# EAGLE board comboultra (EAGLE 7.2.0)
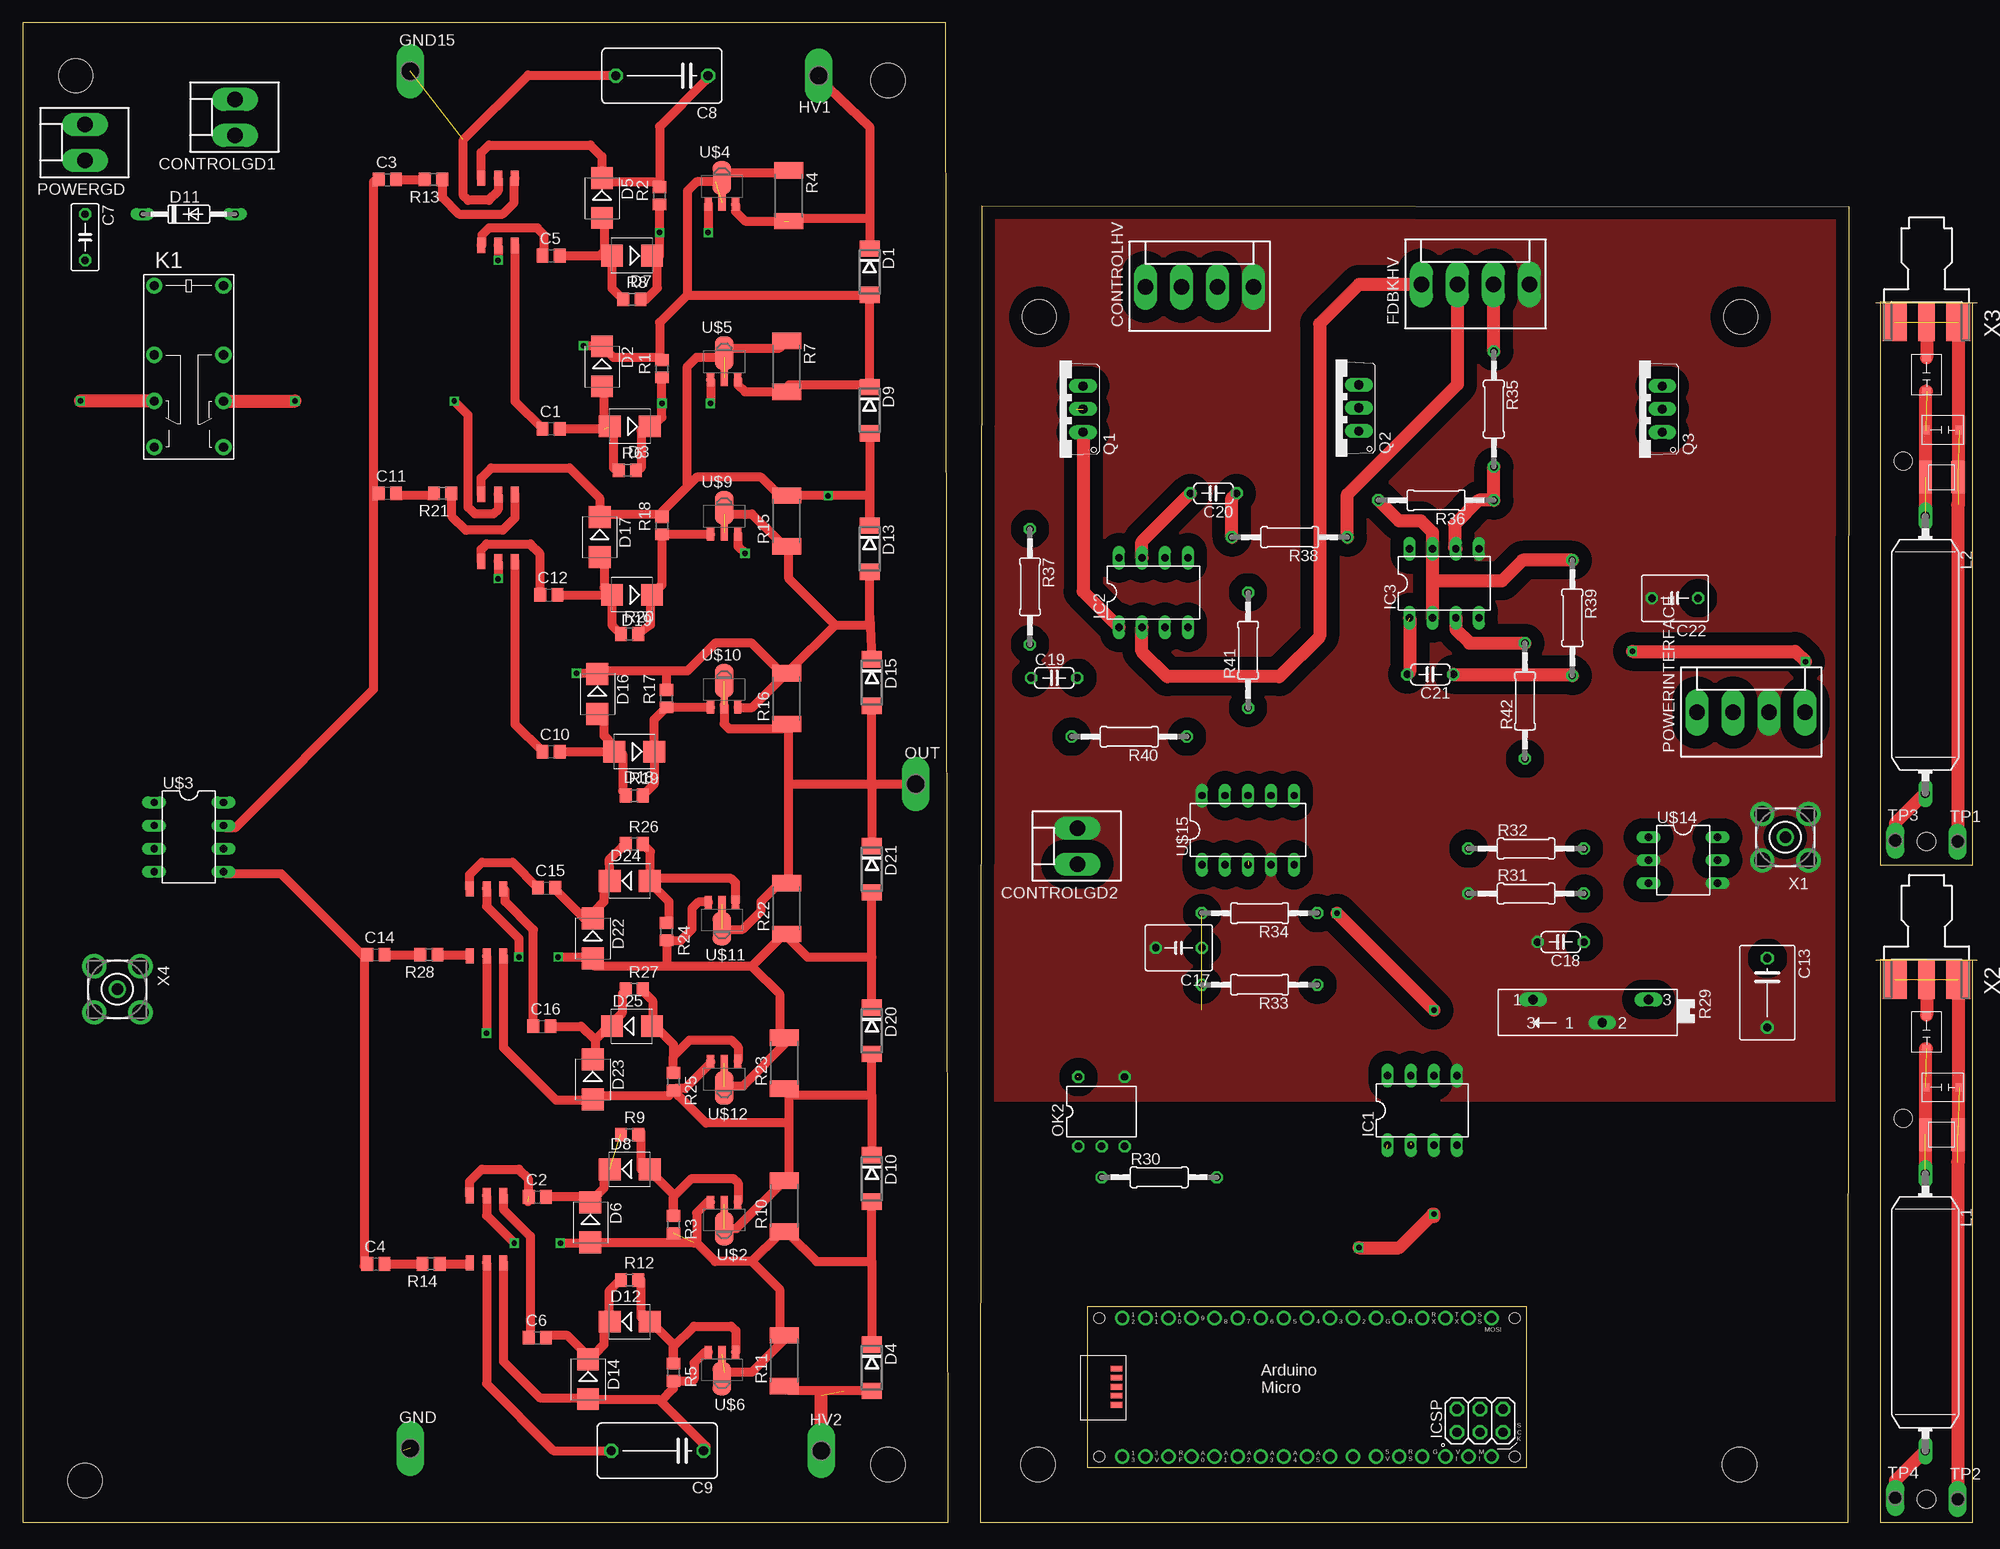
[diagram p0: board, top side]
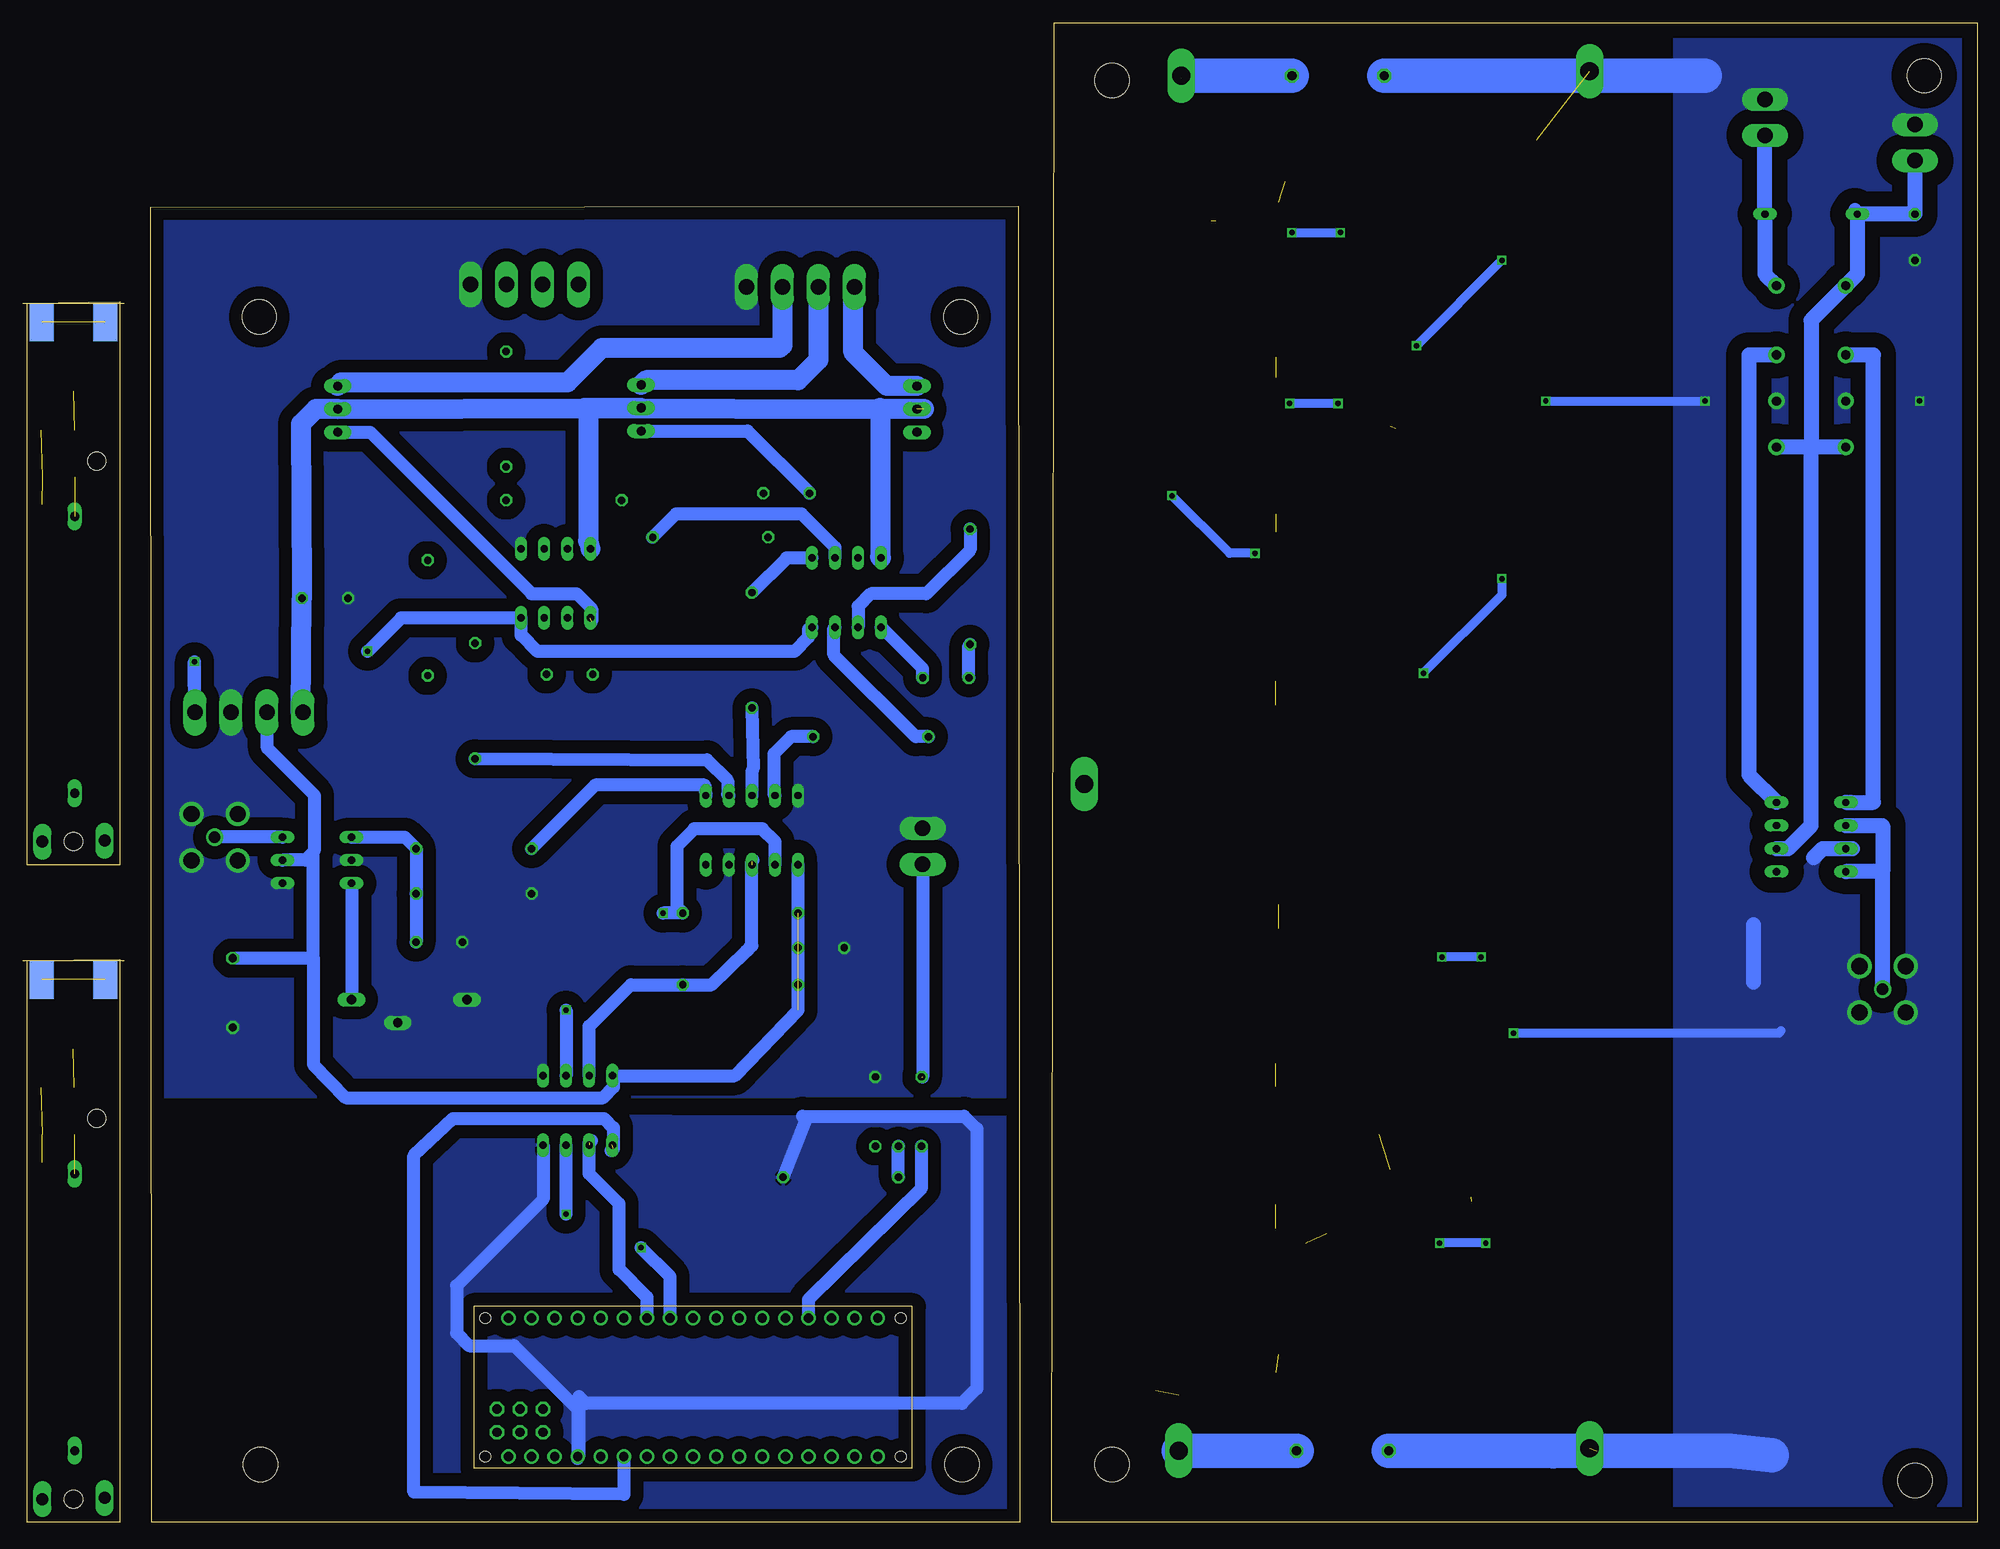
[diagram p1: board, bottom side, seen from below]

Size 214.63 x 165.1 mm. Coordinates in mm from the lower left corner, seen from the top.
Outline: 0,0 101.85,0 101.6,165.1 0,165.1 0,0
Outline: 105.41,0 200.91,0 201.04,144.78 105.54,144.91 105.41,0
Outline: 204.47,0 214.63,0 214.63,61.85 204.47,61.98 204.47,0
Outline: 204.47,72.39 214.63,72.39 214.63,134.24 204.47,134.37 204.47,72.39
Copper layers (1*16): Top 0.035mm / dielectric 1.5mm / Bottom 0.035mm
Design rules "default": minimum track width 10mil, minimum drill 24mil, track to track 8mil, track to pad 8mil, pad to pad 8mil, via to via 8mil, smd to smd 8mil, copper to edge 40mil, drill to drill 8mil, minimum pad ring 10mil, minimum via ring 8mil, stop-mask expansion 4mil, vias tented up to drill 0mil, thermal gap 10mil
Holes 3.8 mm at 95.25,158.75 95.25,6.35 6.86,4.57 5.84,159.26 188.98,6.35 189.1,132.72 111.89,132.72 111.76,6.35
Holes 2 mm at 209.55,2.54 207.01,44.45 209.55,74.93 207.01,116.84

## Footprints (pad centres in the part's own frame; a part is rotated, then mirrored left to right if it is on the bottom)
C0805 = smd 1.3 x 1.5: 1 -0.95,0; 2 0.95,0
C050-030X075 = drill 0.813 octagon: 1 -2.54,0; 2 2.54,0
C102-064X133 = drill 1.016 octagon: 1 -5.08,0; 2 5.08,0
C075-063X106 = drill 0.914 octagon: 1 -3.81,0; 2 3.81,0
C050-050X075 = drill 0.813 octagon: 1 -2.54,0; 2 2.54,0
C050-024X044 = drill 0.813 octagon: 1 -2.54,0; 2 2.54,0
SGC3S = smd 0.9 x 0.8: P$1 0,1.85; P$2 0,-1.85
1111 = smd 1.397 x 3.556: P$1 -1.778,0; P$2 1.778,0
KK-156-2 = drill 1.7 pad 2.184 long: 1 -1.98,0; 2 1.98,0
KK-156-4 = drill 1.7 pad 2.184 long: 1 -5.94,0; 2 -1.98,0; 3 1.98,0; 4 5.94,0
DO214AA = smd 1.8 x 2.2: A 2.55,0; C -2.55,0
SMB = smd 2.4 x 2.4: A 2.2,0; C -2.2,0
DO35-10 = drill 0.813 long: A 5.08,0; C -5.08,0
P1-20Y = drill 2.007 pad 2.54 long: TP 0,0
DIL08 = drill 0.813 long: 1 -3.81,-3.81; 2 -1.27,-3.81; 3 1.27,-3.81; 4 3.81,-3.81; 5 3.81,3.81; 6 1.27,3.81; 7 -1.27,3.81; 8 -3.81,3.81
G5V-2 = drill 1 pad 1.8: 1 -8.89,-3.81; 4 -1.27,-3.81; 6 3.81,-3.81; 8 8.89,-3.81; 9 8.89,3.81; 11 3.81,3.81; 13 -1.27,3.81; 16 -8.89,3.81
SUKW1-30 = drill 1.016 long: 1 -15.24,0; 2 15.24,0
DIL05 = drill 0.813 octagon: 1 -2.54,-3.81; 2 0,-3.81; 3 2.54,-3.81; 4 2.54,3.81; 6 -2.54,3.81
ARDUINO_MICRO = drill 1.016 pad 1.575: 3V3 6.35,1.27; +5V 31.75,1.27; A0 11.43,1.27; A1 13.97,1.27; A2 16.51,1.27; A3 19.05,1.27; A4 21.59,1.27; A5 24.13,1.27; D2 29.21,16.51; D3 26.67,16.51; D4 24.13,16.51; D5 21.59,16.51; D6 19.05,16.51; D7 16.51,16.51; D8 13.97,16.51; D9 11.43,16.51; D10 8.89,16.51; D11 6.35,16.51; D12 3.81,16.51; D13 3.81,1.27; GND 31.75,16.51; GND. 36.83,1.27; MISO] 41.91,1.27; MOSI 44.45,16.51; NC 26.67,1.27; NC. 29.21,1.27; REF 8.89,1.27; RST 34.29,16.51; RST. 34.29,1.27; RX1 36.83,16.51; SCK 44.45,1.27; SS 41.91,16.51; TX1 39.37,16.51; VIN 39.37,1.27 | drill 1.016 pad 1.575 octagon: 5V 40.64,6.477; GND_ 45.72,6.477; MISO. 40.64,3.937; MOSI. 43.18,6.477; RESET.. 45.72,3.937; SCK. 43.18,3.937 | smd 1.27 x 0.635: <USB>+V 3.15,10.947; <USB>D+ 3.15,9.957; <USB>D- 3.15,8.941; <USB>GND 3.15,6.96; <USB>ID 3.15,7.976 | hole 1.2: 1.27,1.27; 1.27,16.51; 46.99,16.51; 46.99,1.27
TO220V = drill 1.016 long: 1 -2.54,-2.54; 2 0,-2.54; 3 2.54,-2.54
R0805 = smd 1.3 x 1.5: 1 -0.95,0; 2 0.95,0
R2512 = smd 1.8 x 3.2: 1 -2.8,0; 2 2.8,0
SP19L = drill 1.016 long: A 5.715,-1.27; E -6.985,-1.27; S -1.905,1.27
0207/12 = drill 0.813 octagon: 1 -6.35,0; 2 6.35,0
P1-13Y = drill 1.321 pad 1.905 long: TP 0,0
SMD6 = smd 1.676 x 0.889: P$1 -3.696,1.854; P$2 -3.696,0; P$3 -3.696,-1.854; P$4 3.696,-1.854; P$5 3.696,0; P$6 3.696,1.854
SOT89-BCE = smd 0.8 x 1.4: B -1.499,-1.981; E 1.499,-1.981 | smd 0.8 x 1.9: C 0,-1.727 | smd 2.032 x 3.65: C@1 0,0.94
DIL06 = drill 0.813 long: DIV 2.54,3.81; GND 0,-3.81; MOD -2.54,-3.81; OUT -2.54,3.81; SET 2.54,-3.81; VCC 0,3.81
DIL10 = drill 0.813 long: 1 -5.08,-3.81; 2 -2.54,-3.81; 3 0,-3.81; 4 2.54,-3.81; 5 5.08,-3.81; 6 5.08,3.81; 7 2.54,3.81; 8 0,3.81; 9 -2.54,3.81; 10 -5.08,3.81
BU-SMA-V = drill 1.27: 1 0,0 | drill 1.778: 2 -2.55,2.55; 3 2.55,2.55; 4 2.55,-2.55; 5 -2.55,-2.55
J502-ND-142-0711-821/826 = smd 4.191 x 1.778: 1 2.115,0 | smd 4.191 x 2.667: G@1 2.115,3.495; G@2 2.115,-3.495 | smd 4.191 x 2.667 bottom: G@3 2.115,3.495; G@4 2.115,-3.495

## Placement (x,y rotation side)
C1  .22u  [C0805]  58.17,120.4 0 top
C2  .22u  [C0805]  56.64,35.81 0 top
C3  .22u  [C0805]  40.13,147.83 0 top
C4  .22u  [C0805]  38.86,28.45 0 top
C5  .22u  [C0805]  58.17,139.45 0 top
C6  .22u  [C0805]  56.64,20.32 0 top
C7  [C050-030X075]  6.86,141.48 270 top
C8  10p  [C102-064X133]  70.36,159.26 180 top
C9  10p  [C102-064X133]  69.85,7.87 180 top
C10  .22u  [C0805]  58.17,84.84 0 top
C11  .22u  [C0805]  40.13,113.28 0 top
C12  .22u  [C0805]  57.91,102.11 0 top
C13  [C075-063X106]  192.02,58.29 270 top
C14  .22u  [C0805]  38.86,62.48 0 top
C15  .22u  [C0805]  57.66,69.85 0 top
C16  .22u  [C0805]  57.15,54.61 0 top
C17  [C050-050X075]  127.25,63.25 180 top
C18  10n  [C050-024X044]  169.29,63.88 180 top
C19  [C050-024X044]  113.54,92.96 0 top
C20  [C050-024X044]  131.06,113.28 180 top
C21  [C050-024X044]  154.94,93.34 180 top
C22  [C050-050X075]  181.86,101.73 180 top
C23  5-20  [SGC3S]  209.55,53.98 180 top
C24  10-30  [SGC3S]  211.33,47.88 270 top
C25  100p  [1111]  211.2,42.67 0 top
C26  5-20  [SGC3S]  209.55,126.36 180 top
C27  10-30  [SGC3S]  211.33,120.27 270 top
C28  100p  [1111]  211.2,115.06 0 top
CONTROLGD1  [KK-156-2]  23.37,154.69 90 top
CONTROLGD2  [KK-156-2]  116.08,74.42 90 top
CONTROLHV  [KK-156-4]  129.54,136.02 0 top
D1  SMBJ170D-M3/H  [DO214AA]  93.22,137.67 270 top
D2  4742  [SMB]  63.75,127.25 270 top
D3  [SMB]  66.8,120.65 180 top
D4  SMBJ170D-M3/H  [DO214AA]  93.47,17.02 270 top
D5  4742  [SMB]  63.75,145.8 270 top
D6  4742  [SMB]  62.48,33.02 270 top
D7  [SMB]  67.06,139.45 180 top
D8  [SMB]  66.8,38.86 0 top
D9  SMBJ170D-M3/H  [DO214AA]  93.22,122.43 270 top
D10  SMBJ170D-M3/H  [DO214AA]  93.47,37.85 270 top
D11  1N4148DO35-10  [DO35-10]  18.29,144.02 0 top
D12  [SMB]  66.8,22.1 0 top
D13  SMBJ170D-M3/H  [DO214AA]  93.22,107.19 270 top
D14  4742  [SMB]  62.23,15.75 270 top
D15  SMBJ170D-M3/H  [DO214AA]  93.47,92.46 270 top
D16  4742  [SMB]  63.25,91.19 270 top
D17  4742  [SMB]  63.5,108.46 270 top
D18  [SMB]  67.31,84.84 180 top
D19  [SMB]  67.06,102.11 180 top
D20  SMBJ170D-M3/H  [DO214AA]  93.47,54.1 270 top
D21  SMBJ170D-M3/H  [DO214AA]  93.47,71.88 270 top
D22  4742  [SMB]  62.74,64.26 270 top
D23  4742  [SMB]  62.74,48.77 270 top
D24  [SMB]  66.8,70.61 0 top
D25  [SMB]  67.06,54.61 0 top
FDBKHV  40k  [KK-156-4]  159.89,136.27 0 top
GND  TPPAD1-20Y  [P1-20Y]  42.67,8.13 0 top
GND15  TPPAD1-20Y  [P1-20Y]  42.67,159.77 0 top
HV1  TPPAD1-20Y  [P1-20Y]  87.63,159.26 180 top
HV2  TPPAD1-20Y  [P1-20Y]  87.88,7.87 0 top
IC1  ISO1540  [DIL08]  154.05,45.34 0 top
IC2  LT1352PA  [DIL08]  124.46,102.36 0 top
IC3  LT1352PA  [DIL08]  156.46,103.38 0 top
K1  G5V-2  [G5V-2]  18.29,127.25 270 top
L1  B82111  [SUKW1-30]  209.42,23.11 270 top
L2  B82111  [SUKW1-30]  209.42,95.5 270 top
OK2  H11F1  [DIL05]  118.75,45.21 0 top
OUT  TPPAD1-20Y  [P1-20Y]  98.3,81.28 0 top
PCB1  ARDUINO_MICRO  [ARDUINO_MICRO]  117.22,5.97 0 top
POWERGD  [KK-156-2]  6.86,151.89 90 top
POWERINTERFACE  [KK-156-4]  190.25,89.15 0 top
Q1  TIP122V  [TO220V]  114.17,122.56 90 top
Q2  TIP122V  [TO220V]  144.53,122.68 90 top
Q3  TIP122V  [TO220V]  177.93,122.56 90 top
R1  100k  [R0805]  70.36,127 90 top
R2  100k  [R0805]  70.1,146.05 90 top
R3  100k  [R0805]  71.63,32.77 270 top
R4  1M  [R2512]  84.33,146.05 270 top
R5  100k  [R0805]  71.63,16.51 270 top
R6  10  [R0805]  66.55,115.82 0 top
R7  1M  [R2512]  84.07,127.25 270 top
R8  10  [R0805]  67.06,134.62 0 top
R9  10  [R0805]  66.8,42.67 0 top
R10  1M  [R2512]  83.82,34.8 90 top
R11  1M  [R2512]  83.82,17.78 90 top
R12  10  [R0805]  66.8,26.67 0 top
R13  50  [R0805]  45.21,147.83 180 top
R14  50  [R0805]  44.96,28.45 180 top
R15  1M  [R2512]  84.07,110.24 90 top
R16  1M  [R2512]  84.07,90.68 90 top
R17  100k  [R0805]  70.87,90.68 90 top
R18  100k  [R0805]  70.36,109.73 90 top
R19  10  [R0805]  67.31,80.01 0 top
R20  10  [R0805]  66.8,97.79 0 top
R21  50  [R0805]  46.23,113.28 180 top
R22  1M  [R2512]  84.07,67.56 90 top
R23  1M  [R2512]  83.82,50.55 90 top
R24  100k  [R0805]  70.87,65.02 270 top
R25  100k  [R0805]  71.63,48.51 270 top
R26  10  [R0805]  67.31,74.68 0 top
R27  10  [R0805]  67.31,58.67 0 top
R28  50  [R0805]  44.7,62.48 180 top
R29  [SP19L]  171.96,56.26 180 top
R30  100  [0207/12]  125.09,37.97 0 top
R31  10k  [0207/12]  165.48,69.22 0 top
R32  40k  [0207/12]  165.48,74.17 0 top
R33  1.5k  [0207/12]  136.14,59.18 180 top
R34  1.5k  [0207/12]  136.14,67.06 180 top
R35  20k  [0207/12]  161.93,122.56 270 top
R36  20k  [0207/12]  155.57,112.52 180 top
R37  [0207/12]  110.87,103 270 top
R38  [0207/12]  139.45,108.46 180 top
R39  [0207/12]  170.56,99.57 270 top
R40  20k  [0207/12]  121.79,86.49 180 top
R41  20k  [0207/12]  134.87,96.01 90 top
R42  12  [0207/12]  165.35,90.42 90 top
TP1  TPPAD1-13Y  [P1-13Y]  212.98,74.93 0 top
TP2  TPPAD1-13Y  [P1-13Y]  212.98,2.54 0 top
TP3  TPPAD1-13Y  [P1-13Y]  206.12,75.06 0 top
TP4  TPPAD1-13Y  [P1-13Y]  206.12,2.67 0 top
U$1  DA-2320SMD6  [SMD6]  52.32,144.27 270 top
U$2  VN2450  [SOT89-BCE]  77.22,33.27 180 top
U$3  UCC27425  [DIL08]  18.29,75.44 270 top
U$4  VP2450  [SOT89-BCE]  76.96,147.07 0 top
U$5  VP2450  [SOT89-BCE]  77.22,127.76 0 top
U$6  VN2450  [SOT89-BCE]  76.96,16.76 180 top
U$7  DA-2320SMD6  [SMD6]  51.05,32.26 90 top
U$8  DA-2320SMD6  [SMD6]  52.32,109.47 270 top
U$9  VP2450  [SOT89-BCE]  77.22,110.74 0 top
U$10  VP2450  [SOT89-BCE]  77.22,91.69 0 top
U$11  VN2450  [SOT89-BCE]  76.96,66.29 180 top
U$12  VN2450  [SOT89-BCE]  77.22,48.77 180 top
U$13  DA-2320SMD6  [SMD6]  51.05,66.04 90 top
U$14  LTC6992  [DIL06]  182.75,72.9 270 top
U$15  MCP4728DIL  [DIL10]  134.87,76.2 0 top
X1  BU-SMA-V  [BU-SMA-V]  194.01,75.41 180 top
X2  SMA-142-0711-821/826  [J502-ND-142-0711-821/826]  209.55,61.85 270 top
X3  SMA-142-0711-821/826  [J502-ND-142-0711-821/826]  209.55,134.24 270 top
X4  BU-SMA-V  [BU-SMA-V]  10.41,58.67 270 top

## Library data of the parts
C1-C6 C8-C16 C18-C22 C25 C28 R31-R42 = resistor
C7 C17 R1-R28 R30 = rcl
C23 C24 C26 C27 = sprague
CONTROLGD1 CONTROLGD2 CONTROLHV FDBKHV POWERGD POWERINTERFACE = con-molex; OC_FARNELL: unknown; OC_NEWARK: unknown
D1-D25 = diode
GND GND15 HV1 HV2 OUT TP1-TP4 = testpad
IC1 U$3 = texas
IC2 IC3 = linear-technology; OC_FARNELL: unknown; OC_NEWARK: unknown
K1 = relay; MPN: G5V-2 5DC; OC_FARNELL: 9949488; OC_NEWARK: 78K5703
L1 L2 = inductors
OK2 = optocoupler; OC_FARNELL: unknown; OC_NEWARK: unknown
PCB1 = E14_Arduino_published
Q1-Q3 = transistor-npn
R29 = pot
U$1 U$7 U$8 U$13 = trafo
U$2 U$4-U$6 U$9-U$12 = transistor-fet
U$14 = linear-technology
U$15 = microchip
X1 X4 = con-coax; OC_FARNELL: unknown; OC_NEWARK: unknown
X2 X3 = con-coax; MF: JOHNSON COMPONENTS; MPN: 142-0711-821; OC_FARNELL: 1019328; OC_NEWARK: 16F3627

## Nets
+12V: C22.1 IC2.8 IC3.8 POWERINTERFACE.1 Q1.2 Q2.2 Q3.2
+15V: C7.1 D11.C K1.1 K1.8 K1.9 POWERGD.1 U$3.6
-5V: IC2.4 IC3.4 POWERINTERFACE.4
A+5: IC1.1 PCB1.+5V
AGND: IC1.4 PCB1.GND. R30.2
D4: PCB1.D4
D7: PCB1.D7
D8: PCB1.D8
D10: PCB1.D10
D11: PCB1.D11
ENSW: CONTROLGD1.1 D11.A K1.16
ENSW2: CONTROLGD2.1 OK2.6
GND: C7.2 C8.2 C9.2 CONTROLGD1.2 GND15.TP GND.TP K1.6 K1.11 POWERGD.2 U$1.P$2 U$3.3 U$7.P$2 U$8.P$2 U$13.P$2 X4.2 X4.3 X4.4 X4.5
GND1: C13.2 C17.2 C18.2 C22.2 CONTROLGD2.2 CONTROLHV.4 FDBKHV.4 IC1.5 IC3.5 OK2.4 POWERINTERFACE.3 R29.A R29.S R31.1 U$14.DIV U$14.GND U$15.4 U$15.10 X1.2 X1.3 X1.4 X1.5
N$1: U$3.2 U$3.4 X4.1
N$2: C3.1 C11.1 U$3.7
N$3: R13.1 U$1.P$1
N$4: C4.1 C14.1 U$3.5
N$5: C1.1 U$1.P$6
N$6: R14.1 U$7.P$1
N$7: C5.1 U$1.P$4
N$8: D3.C R1.1 R6.2 U$5.B
N$9: R29.E U$14.SET
N$10: C1.2 D2.A D3.A R6.1
N$11: D12.A R5.1 R12.2 U$6.B
N$12: D7.C R2.1 R8.2 U$4.B
N$13: D4.C D6.A D10.A R3.2 R10.1 R11.2 U$2.E U$6.C U$6.C@1 U$7.P$5
N$14: K1.4 U$3.1
N$15: K1.13 U$3.8
N$16: C5.2 D5.A D7.A R8.1
N$17: C8.1 D1.C D5.C HV1.TP R2.2 R4.2 U$1.P$3 U$4.E
N$18: D1.A D2.C D9.C R1.2 R4.1 R7.2 U$1.P$5 U$4.C U$4.C@1 U$5.E
N$19: C3.2 R13.2
N$20: C4.2 R14.2
N$21: U$14.OUT X1.1
N$22: C2.1 U$7.P$6
N$23: C6.1 U$7.P$4
N$24: C9.1 D4.A D14.A HV2.TP R5.2 R11.1 U$6.E U$7.P$3
N$25: C2.2 D6.C D8.C R9.1
N$26: D15.A D21.C OUT.TP R16.1 R22.2 U$10.C U$10.C@1 U$11.C U$11.C@1
N$27: C6.2 D12.C D14.C R12.1
N$28: C10.1 U$8.P$6
N$29: C12.1 U$8.P$4
N$30: C12.2 D17.A D19.A R20.1
N$31: C18.1 R31.2 R32.2 U$14.MOD
N$32: D9.A D13.C D17.C R7.1 R15.2 R18.2 U$5.C U$5.C@1 U$8.P$3 U$9.E
N$33: D13.A D15.C D16.C R15.1 R16.2 R17.2 U$8.P$5 U$9.C U$9.C@1 U$10.E
N$34: D18.C R17.1 R19.2 U$10.B
N$35: C10.2 D16.A D18.A R19.1
N$36: D19.C R18.1 R20.2 U$9.B
N$37: R21.1 U$8.P$1
N$38: C11.2 R21.2
N$39: FDBKHV.1 IC2.2 R37.1
N$40: C15.1 U$13.P$6
N$41: C16.1 U$13.P$4
N$42: C15.2 D22.C D24.C R26.1
N$43: C16.2 D23.C D25.C R27.1
N$44: IC3.2 IC3.7 R36.2 R39.1
N$45: IC2.5 R41.2
N$46: D20.C D21.A D22.A R22.1 R23.2 R24.2 U$11.E U$12.C U$12.C@1 U$13.P$5
N$47: D25.A R25.1 R27.2 U$12.B
N$48: R28.1 U$13.P$1
N$49: C14.2 R28.2
N$50: D24.A R24.1 R26.2 U$11.B
N$51: D10.C D20.A D23.A R10.2 R23.1 R25.2 U$2.C U$2.C@1 U$12.E U$13.P$3
N$52: IC3.3 R42.2
N$53: R32.1 U$15.6
N$54: C19.2 IC2.1 Q1.1
N$56: CONTROLHV.1 Q1.3
N$57: FDBKHV.2 IC2.6 R38.1
N$58: C20.2 IC2.7 Q2.1
N$59: FDBKHV.3 R35.1
N$60: IC3.6 R35.2 R36.1
N$61: C21.2 IC3.1 Q3.1
N$62: OK2.2 R30.1
N$63: C19.1 R37.2
N$64: C20.1 R38.2
N$65: C21.1 R39.2
N$66: IC2.3 R40.2
N$67: R40.1 U$15.9
N$68: R42.1 U$15.7
N$69: R41.1 U$15.8
N$70: CONTROLHV.3 Q3.3
N$71: CONTROLHV.2 Q2.3
N$72: C23.P$1 C24.P$2 C25.P$1 L1.1
N$73: C23.P$2 X2.1
N$74: C24.P$1 C25.P$2 TP2.TP X2.G@1 X2.G@2 X2.G@3 X2.G@4
N$75: L1.2 TP4.TP
N$76: C26.P$1 C27.P$2 C28.P$1 L2.1
N$77: C26.P$2 X3.1
N$78: C27.P$1 C28.P$2 TP1.TP X3.G@1 X3.G@2 X3.G@3 X3.G@4
N$79: L2.2 TP3.TP
N$251: D8.A R3.1 R9.2 U$2.B
PWM5: PCB1.D5
PWM6: PCB1.D6
PWM9: OK2.1 PCB1.D9
SCL: IC1.3 PCB1.D3
SCL_OUT: IC1.6 R34.1 U$15.2
SDA: IC1.2 PCB1.D2
SDA_OUT: IC1.7 R33.1 U$15.3
VCC: C13.1 C17.1 IC1.8 POWERINTERFACE.2 R33.2 R34.2 U$14.VCC U$15.1

## Tracks (layer width: path | path; a pad name or v marks a point on that pad's centre or on a via)
+12V  (1 unrouted)
  Bottom 2.184: POWERINTERFACE.1 184.53,89.03 C22.1 184.4,102.74 184.53,120.9 182.88,122.56 Q3.2 152.91,122.68 | 152.91,122.68 120.65,122.56 | 115.95,122.56 120.65,122.56 | 120.65,122.56 120.78,122.68 120.78,106.3 IC2.8 | Q2.2 152.91,122.68 | 153.29,122.68 152.91,122.68 | 152.91,122.68 152.91,108.08 IC3.8
+15V
  Bottom 1.016: 13.21,144.53 D11.C
  Bottom 1.422: 13.46,144.02 13.46,144.53
  Bottom 1.676: D11.C 13.21,137.41 K1.1 18.29,132.33 18.29,118.36 | 18.29,118.36 18.29,76.71 20.83,74.17 U$3.6 | 18.29,118.36 K1.9 | K1.8 18.29,118.36 | POWERGD.1 C7.1 D11.C | D11.C 13.46,144.02
-5V  (via drill 0.6)
  Top 1.422: v177.16,95.89 195.09,95.89 v196.24,94.75
  Bottom 1.422: IC2.4 128.4,98.55 128.65,98.3 128.65,97.41 130.18,95.89 158.5,95.89 160.27,97.66 IC3.4 173.48,99.57 v177.16,95.89 | POWERINTERFACE.4 v196.24,94.75 196.24,89.2 POWERINTERFACE.4
A+5  (1 unrouted)
  Bottom 1.422: PCB1.+5V 148.97,3.05 172.09,3.3 172.09,40.39 167.77,44.45 151.13,44.45 150.11,43.43 150.11,41.15 150.37,40.89
AGND
  Bottom 1.422: IC1.4 157.86,35.56 167.39,26.04 167.39,20.83 165.99,19.43 161.04,19.43 154.05,12.45 PCB1.GND. | PCB1.GND. 154.05,6.99 | R30.2 128.91,44.32 129.29,44.7 111.51,44.7 110.11,43.31 110.11,14.73 111.76,13.08 153.16,13.08 153.92,13.84 153.92,7.37 PCB1.GND.
  pour Bottom (isolate 1.422): 105.28,0.13 201.17,0.25 201.17,44.83 105.41,44.58
ENSW
  Bottom 1.676: CONTROLGD1.1 D11.A 23.37,137.41 K1.16
ENSW2  (1 unrouted)
  Bottom 1.422: CONTROLGD2.1 116.08,49.02
GND  (via drill 0.6)  (2 unrouted)
  Top 1.016: U$1.P$2 52.32,146.56 51.31,145.54 49.02,145.54 48.51,146.05 48.51,152.21 55.62,159.32 65.21,159.32 C8.2 | U$8.P$2 52.32,111.51 51.82,111 49.78,111 49.02,111.76 49.02,121.92 v47.5,123.44 | U$13.P$2 v51.05,53.85 | U$7.P$2 51.05,15.24 58.42,7.87 C9.2
  Top 1.422: K1.6 v6.35,123.44 | K1.11 v29.97,123.44
  Bottom 1.016: 15.24,74.17 15.24,74.42 U$3.3 | v47.5,123.44 v29.97,123.44 | v51.05,53.85 21.84,53.85 21.59,54.1
  Bottom 1.422: 41.66,8.13 41.91,7.87
  Bottom 1.676: 24.64,65.79 24.64,59.44 | 18.03,73.15 17.02,74.17 15.24,74.17 U$3.3 13.72,74.17
  Bottom 3.81: 46.69,7.82 27.18,7.85 | 27.18,7.85 22.61,7.37 | C8.2 29.97,159.26 | C9.2 41.91,7.87 27.18,7.87 27.18,7.85
  pour Bottom (isolate 1.676, no thermals): 0,165.1 33.27,165.1 33.27,0 0,0
GND1
  pour Bottom (isolate 1.422, no thermals): 105.54,144.65 201.04,144.65 200.91,46.86 105.41,46.86
  pour Top (isolate 1.422, no thermals): 105.54,144.78 201.17,144.78 201.04,46.48 105.41,46.48
N$1
  Bottom 1.676: X4.1 10.41,71.63 | U$3.2 10.41,76.71 10.41,71.63 | 10.41,71.63 U$3.4
N$2
  Top 1.016: 38.61,113.03 38.61,147.57 C3.1 | 38.61,113.03 38.61,91.69 23.37,76.45 22.35,76.45 U$3.7 | 38.61,113.03 C11.1
N$3
  Top 1.016: R13.1 46.16,145.86 48.01,144.02 52.83,144.02 54.1,145.29 54.1,147.89 U$1.P$1
N$4
  Top 1.016: 37.59,62.23 37.59,28.19 C4.1 | 37.59,62.23 28.45,71.37 22.35,71.37 U$3.5 | 37.59,62.23 C14.1
N$5
  Top 1.016: U$1.P$6 54.18,123.43 C1.1
N$6
  Top 1.016: R14.1 49.09,28.45 U$7.P$1
N$7
  Top 1.016: C5.1 57.22,140.02 57.4,140.21 57.4,141.73 56.64,142.49 51.31,142.49 50.55,141.73 50.55,140.65 U$1.P$4
N$8  (via drill 0.6)
  Top 1.016: R6.2 68.07,116.08 68.07,120.14 D3.C 69.34,120.65 70.36,121.67 v70.36,123.19 R1.1 | U$5.B 75.72,123.22 v75.69,123.19
  Bottom 1.016: v75.69,123.19 v70.36,123.19
N$9
  Bottom 1.422: U$14.SET R29.E
N$10  (1 unrouted)
  Top 1.016: R6.1 65.02,116.08 65.02,120.14 D3.A 64.01,121.16 64.01,124.21 D2.A | C1.2 64.01,120.4
N$11
  Top 1.016: R12.2 68.07,26.67 68.07,22.61 D12.A 69.09,22.1 71.63,19.56 R5.1 71.63,19.3 73.91,21.59 77.98,21.59 78.49,21.08 78.49,18.77 U$6.B
N$12  (via drill 0.6)
  Top 1.016: R2.1 v70.1,141.99 70.1,139.45 69.85,139.45 | 69.85,139.45 D7.C | R8.2 68.58,134.62 69.85,135.89 69.85,139.45 | U$4.B 75.46,142.01 v75.44,141.99
  Bottom 1.016: v75.44,141.99 v70.1,141.99
N$13  (via drill 0.6)  (2 unrouted)
  Top 1.016: 73.91,30.73 74.17,30.73 76.2,28.7 80.26,28.7 | 73.91,30.73 62.99,30.73 D6.A 62.4,30.73 v59.18,30.73 | 80.26,28.7 83.31,31.75 R10.1 84.33,31.75 87.38,28.7 93.47,28.7 | 80.26,28.7 83.31,25.65 83.31,20.57 R11.2 84.33,20.57 80.26,16.51 77.22,16.51 U$6.C@1 | 93.47,28.7 D10.A | 93.47,28.7 D4.C | U$7.P$5 51.05,33.78 v54.1,30.73 | U$2.E 75.39,35.26 74.17,34.04 74.17,30.99 73.91,30.73
  Bottom 1.016: v54.1,30.73 v59.18,30.73
N$14
  Bottom 1.676: 13.97,79.25 U$3.1 11.43,79.25 11.43,128.52 K1.4
N$15
  Bottom 1.676: K1.13 25.15,128.52 25.15,82.3 U$3.8
N$16
  Top 1.016: 64.01,139.95 64.01,143.51 D5.A | 64.01,139.95 64.01,139.45 D7.A 64.86,135.87 R8.1 | C5.2 63.5,139.45 64.01,139.95
N$17  (2 unrouted)
  Top 1.016: 93.22,143.51 84.33,143.51 R4.2 | 70.1,147.57 64.01,147.57 D5.C 63.75,150.37 62.48,151.64 51.31,151.64 50.47,150.8 U$1.P$3 | 70.1,147.57 70.1,153.67 75.18,158.75 C8.1 | 70.1,147.57 R2.2 | 93.22,143.51 93.22,153.67 87.63,159 | 93.22,143.51 D1.C | U$4.E 78.46,144.3 79.5,143.26 83.82,143.26
  Bottom 1.016: 87.12,159.26 87.38,159.77 HV1.TP 87.63,159
  Bottom 3.81: C8.1 87.12,159.26
N$18  (via drill 0.6)  (1 unrouted)
  Top 1.016: 93.22,125.22 84.33,125.22 R7.2 79.5,124.46 78.72,125.25 U$5.E | 93.22,125.22 D9.C | 93.22,125.22 D1.A 73.15,135.13 | 70.1,128.27 65.02,128.27 64.01,129.29 D2.C 63.67,129.54 v61.72,129.54 | R4.1 84.33,148.59 77.22,148.59 U$4.C@1 76.2,147.57 74.17,147.57 73.15,146.56 73.15,135.13 | 70.1,128.27 70.1,132.08 73.15,135.13 | 70.1,128.27 R1.2 | U$1.P$5 v52.32,138.94
  Bottom 1.016: v52.32,138.94 v61.72,129.54
N$19
  Top 1.016: C3.2 R13.2
N$20
  Top 1.016: C4.2 R14.2
N$21
  Bottom 1.422: U$14.OUT 193.73,75.44 X1.1
N$22  (1 unrouted)
  Top 1.016: U$7.P$6 49.2,37.52 50.55,38.86 54.61,38.86 55.63,37.85 55.63,35.31
N$23
  Top 1.016: U$7.P$4 52.91,34.47 55.88,31.5 55.88,20.51 C6.1
N$24  (1 unrouted)
  Top 1.016: D4.A 90.42,14.48 84.33,14.48 R11.1 | 70.23,13.34 75.18,8.38 C9.1 | 70.23,13.34 70.1,13.46 62.99,13.46 62.74,13.49 | 62.74,13.49 D14.A | U$7.P$3 52.91,17.7 56.9,13.72 62.52,13.72 62.74,13.49 | U$6.E 75.13,18.75 73.91,17.53 73.91,15.75 73.66,15.49 71.69,15.49 R5.2 71.63,14.73 70.23,13.34
  Top 1.422: HV2.TP 87.88,13.97
  Bottom 1.016: 88.39,7.87 HV2.TP
  Bottom 1.676: 87.88,7.62 HV2.TP
  Bottom 3.81: HV2.TP C9.1
N$25  (1 unrouted)
  Top 1.016: C2.2 61.98,35.81 D6.C 62.99,35.81 64.01,36.83 64.01,38.86 D8.C
N$26  (2 unrouted)
  Top 1.016: 93.47,81.28 OUT.TP | 93.47,81.28 D21.C | 77.22,92.71 U$10.C@1 | U$11.C@1 77.22,65.28 79.25,65.28 81.28,67.31 81.28,68.33 83.31,70.36 R22.2 84.33,70.36 84.33,81.28 | 84.33,81.28 84.33,87.63 R16.1 83.57,87.38 77.72,87.38 77.22,87.88 U$10.C | 84.33,81.28 93.47,81.28 | 93.47,81.28 D15.A
N$27
  Top 1.016: C6.2 57.91,20.57 59.94,20.57 61.98,18.54 D14.C 62.99,18.54 64.01,19.56 64.01,21.59 D12.C 64.52,22.18 64.52,25.4 65.79,26.67 R12.1
N$28
  Top 1.016: U$8.P$6 54.18,87.87 C10.1
N$29
  Top 1.016: U$8.P$4 50.47,107.11 51.05,107.7 55.88,107.7 56.9,106.68 56.9,102.3 C12.1
N$30
  Top 1.016: 64.39,102.53 64.01,102.87 64.01,105.92 D17.A | 64.39,102.53 D19.A 64.86,98.79 R20.1 | C12.2 63.97,102.11 64.39,102.53
N$31
  Bottom 1.422: U$14.MOD 173.1,75.44 R32.2 R31.2 C18.1
N$32  (via drill 0.6)  (1 unrouted)
  Top 1.016: R7.1 83.31,129.29 77.22,129.29 U$5.C@1 77.22,128.27 74.17,128.27 73.15,127.25 73.15,114.05 | 64.01,111 70.1,111 | 64.01,111 D17.C | D9.A D13.C 93.22,113.03 v88.65,113.03 84.33,113.03 R15.2 83.31,113.03 81.28,115.06 74.17,115.06 73.15,114.05 | 73.15,114.05 70.1,111 | 70.1,111 R18.2 | U$8.P$3 50.47,114.99 51.56,116.08 60.2,116.08 63.5,112.78 63.5,111.51 64.01,111 | U$9.E 78.72,107.47 v79.5,106.68
  Bottom 1.016: v79.5,106.68 82.3,106.68 v88.65,113.03
N$33  (via drill 0.6)  (1 unrouted)
  Top 1.016: U$9.C@1 77.22,111 80.26,111 83.31,107.95 R15.1 84.33,106.93 84.33,103.89 89.41,98.81 | D15.C 93.22,99.82 D13.A 93.22,98.81 89.41,98.81 | 70.87,93.73 73.15,93.73 76.2,96.77 80.26,96.77 83.31,93.73 R16.2 | 70.87,93.73 64.01,93.73 D16.C 63.16,93.47 v60.96,93.47 | 89.41,98.81 84.33,93.73 R16.2 | U$8.P$5 v52.32,103.89 | R17.2 70.87,93.73 | U$10.E 80.31,89.71 R16.2
  Bottom 1.016: v52.32,103.89 52.32,102.11 v60.96,93.47
N$34
  Top 1.016: U$10.B 75.7,89.73 R17.1 69.51,88.37 D18.C 69.51,81.26 R19.2
N$35
  Top 1.016: R19.1 66.04,80.52 66.04,84.58 D18.A | D16.A 64.01,88.65 64.01,86.61 65.02,85.6 D18.A | C10.2 D18.A
N$36
  Top 1.016: R20.2 69.09,98.81 69.09,101.85 D19.C 70.36,103.21 R18.1 75.7,108.78 U$9.B
N$37
  Top 1.016: U$8.P$1 54.18,110.57 52.83,109.22 48.77,109.22 47.24,110.74 47.24,113.22 R21.1
N$38
  Top 1.016: C11.2 41.66,113.03 44.7,113.03 R21.2
N$39
  Top 1.422: FDBKHV.1 147.07,136.27 142.75,131.95 142.75,97.54 138.3,93.09 125.98,93.09 123.19,95.89 IC2.2
  Bottom 1.422: R37.1 110.87,107.06 115.7,102.23 121.79,102.23 123.19,100.84 IC2.2
N$40
  Top 1.016: U$13.P$6 49.2,71.3 50.55,72.64 53.91,72.64 C15.1
N$41
  Top 1.016: C16.1 56.2,65.21 53.09,68.33 53.09,69.56 U$13.P$4
N$42
  Top 1.016: R26.1 66.04,74.42 64.52,72.9 D24.C 64.01,70.36 64.01,68.33 62.99,67.31 D22.C 61.98,66.29 58.93,69.34 C15.2
N$43
  Top 1.016: R27.1 66.04,58.17 66.04,56.13 65.02,55.12 D25.C 64.01,54.1 62.99,53.09 | 62.99,53.09 62.99,51.05 D23.C | C16.2 61.47,54.61 62.99,53.09
N$44
  Top 1.422: R36.2 151.51,110.24 153.92,110.24 155.19,108.97 IC3.7 155.19,103.76 | IC3.2 155.19,103.76 | R39.1 165.1,105.92 162.81,103.63 155.32,103.63 155.19,103.76
N$45
  Bottom 1.422: IC2.5 131.06,106.17 R41.2
N$46  (via drill 0.6)  (1 unrouted)
  Top 1.016: 80.26,61.21 71.12,61.21 | 71.12,61.21 62.99,61.21 D22.A 62.57,62.23 v58.93,62.23 | 80.26,61.21 83.31,64.26 R22.1 84.33,64.26 86.36,62.23 93.47,62.23 | 80.26,61.21 83.31,58.17 83.31,54.1 R23.2 84.33,53.09 79.25,48.01 77.22,48.01 U$12.C@1 | D20.C 93.47,62.23 | 93.47,62.23 D21.A | U$13.P$5 51.05,67.82 54.61,64.26 v54.61,62.23 | U$11.E 74.37,68.28 73.66,67.56 73.66,65.28 72.39,64.01 70.93,64.01 R24.2 70.87,61.47 71.12,61.21
  Bottom 1.016: v54.61,62.23 v58.93,62.23
N$47
  Top 1.016: 71.63,51.31 71.63,52.58 70.1,54.1 D25.A 69.34,54.7 69.34,57.4 68.26,58.49 R27.2 | R25.1 71.63,51.31 | 71.63,51.31 73.41,53.09 77.98,53.09 78.74,52.32 78.74,50.77 U$12.B
N$48
  Top 1.016: R28.1 49.06,62.48 U$13.P$1
N$49
  Top 1.016: C14.2 R28.2
N$50
  Top 1.016: R24.1 71.12,66.29 71.12,68.33 69.09,70.36 | 69.09,70.36 D24.A 69.26,70.87 77.98,70.87 78.46,70.38 U$11.B | 69.09,70.36 69.09,73.85 R26.2
N$51  (1 unrouted)
  Top 1.016: R25.2 71.12,46.99 62.99,46.99 D23.A 62.65,46.48 58.67,46.48 52.91,52.25 U$13.P$3 | 84.33,46.99 84.33,43.94 | 84.33,43.94 84.33,37.85 R10.2 78.56,32.33 U$2.C@1 | 84.33,43.94 75.18,43.94 72.14,46.99 R25.2 | 93.47,46.99 D10.C | 93.47,46.99 84.33,46.99 | 84.33,46.99 R23.1 | 93.47,46.99 D20.A | U$12.E 75.72,50.57 72.9,47.75 71.82,47.75 R25.2
N$52
  Top 1.422: IC3.3 157.73,98.3 159.26,96.77 R42.2
N$53
  Bottom 1.422: U$15.6 140.08,81.15 152.15,81.15 R32.1
N$54
  Top 1.422: Q1.1 116.71,102.49 IC2.1
  Bottom 1.422: C19.2 116.08,93.98 IC2.1
N$56
  Bottom 2.184: Q1.3 120.02,125.09 123.7,128.78 123.7,135.92 CONTROLHV.1
N$57
  Top 1.422: FDBKHV.2 157.91,125.27 145.8,113.16 R38.1
  Bottom 1.422: IC2.6 125.73,107.31 129.41,111 143.26,111 R38.1
N$58
  Top 1.422: IC2.7 123.19,107.95 C20.2
  Bottom 1.422: Q2.1 135.38,120.14 C20.2
N$59
  Top 1.422: R35.1 161.93,136.22 FDBKHV.3
N$60
  Top 1.422: IC3.6 157.61,107.31 157.61,109.86 160.27,112.52 R36.1 R35.2
N$61  (1 unrouted)
  Top 1.422: IC3.1 152.65,93.6 C21.2
  Bottom 1.422: Q3.1 176.91,120.02 159.13,102.23 154.18,102.23 152.53,100.58 152.53,99.19 152.65,99.06
N$62
  Bottom 1.422: R30.1 OK2.2
N$63
  Bottom 1.422: C19.1 111,96.52 R37.2
N$64
  Top 1.422: R38.2 133.1,112.78 C20.1
N$65
  Top 1.422: C21.1 170.43,93.34 R39.2
N$66
  Bottom 1.422: R40.2 116.84,86.49 125.86,95.5 125.86,98.42 IC2.3
N$67
  Bottom 1.422: R40.1 130.56,86.49 132.46,84.58 132.46,80.14 U$15.9
N$68
  Bottom 1.422: R42.1 139.83,83.95 137.54,81.66 137.54,80.14 U$15.7
N$69
  Bottom 1.422: R41.1 134.75,82.93 134.87,82.68 U$15.8
N$70
  Bottom 2.184: CONTROLHV.3 131.52,129.59 131.83,129.29 151.38,129.29 155.19,125.48 180.09,125.48 Q3.3
N$71
  Bottom 2.184: CONTROLHV.2 127.56,127.96 129.79,125.73 146.56,125.73 Q2.3
N$72  (2 unrouted)
  Top 1.422: C23.P$1 209.42,52.12 L1.1
N$73
  Top 1.422: X2.1 209.62,59.73 C23.P$2
N$74  (5 unrouted)
  Top 1.422: X2.G@3 213.04,39.63 212.98,39.63 TP2.TP
N$75
  Top 1.422: L1.2 206.12,4.57 TP4.TP
N$76  (2 unrouted)
  Top 1.422: C26.P$1 209.42,124.52 L2.1
N$77
  Top 1.422: X3.1 209.62,132.12 C26.P$2
N$78  (5 unrouted)
  Top 1.422: X3.G@3 213.04,112.02 212.98,112.02 TP1.TP
N$79
  Top 1.422: L2.2 206.12,76.96 TP3.TP
N$251
  Top 1.016: R9.2 68.07,42.93 68.07,38.86 D8.A 69,38.69 71.63,36.07 R3.1 71.63,35.81 73.66,37.85 78.23,37.85 78.74,37.34 78.74,35.28 U$2.B
PWM9
  Bottom 1.422: PCB1.D9 128.65,24.51 116.2,36.83 OK2.1
SCL  (via drill 0.6)
  Top 1.422: v147.07,30.23 151.51,30.23 155.19,33.91 155.32,33.66 v155.32,33.91
  Bottom 1.422: PCB1.D3 143.89,27.05 v147.07,30.23 | v155.32,33.91 IC1.3
SCL_OUT  (via drill 0.6)
  Top 1.422: v144.65,67.06 v155.32,56.39
  Bottom 1.422: U$15.2 132.33,74.93 133.73,76.33 141.22,76.33 143.13,74.42 143.13,67.69 R34.1 v144.65,67.06 | v155.32,56.39 IC1.6
SDA  (1 unrouted)
  Bottom 1.422: PCB1.D2 146.43,24.77 149.48,27.81 149.48,35.05 152.78,38.35 152.78,41.78 152.53,42.04
SDA_OUT  (1 unrouted)
  Bottom 1.422: IC1.7 152.78,54.61 148.21,59.18 R33.1 139.32,59.18 135.51,62.87 134.87,63.5 134.87,72.77 134.75,72.9
VCC  (3 unrouted)
  Bottom 1.422: 183.13,73.79 183.01,74.04 183.01,80.01 188.21,85.22 188.21,89.59 POWERINTERFACE.2 | 183.13,73.79 184.02,72.9 U$14.VCC | C13.1 183.13,62.1 | 183.13,62.1 183.13,73.79 | U$15.1 129.79,56.39 136.78,49.15 IC1.8 150.11,49.02 150.11,47.88 151.26,46.74 179.58,46.74 183.13,50.42 183.13,62.1